# Altium PCB STM32_PCB.PcbDoc
Units mm, origin at the board's own origin, x right, y up, seen from the top; angles counter-clockwise.
Board outline 36 x 36 mm, 4 copper layers (L1(SIGNAL), L2 (GND), L3 (GND), L4 (SIGNAL)), stack 1.57 mm thick; 36 components, 27 nets, 176 pads, 65 vias.
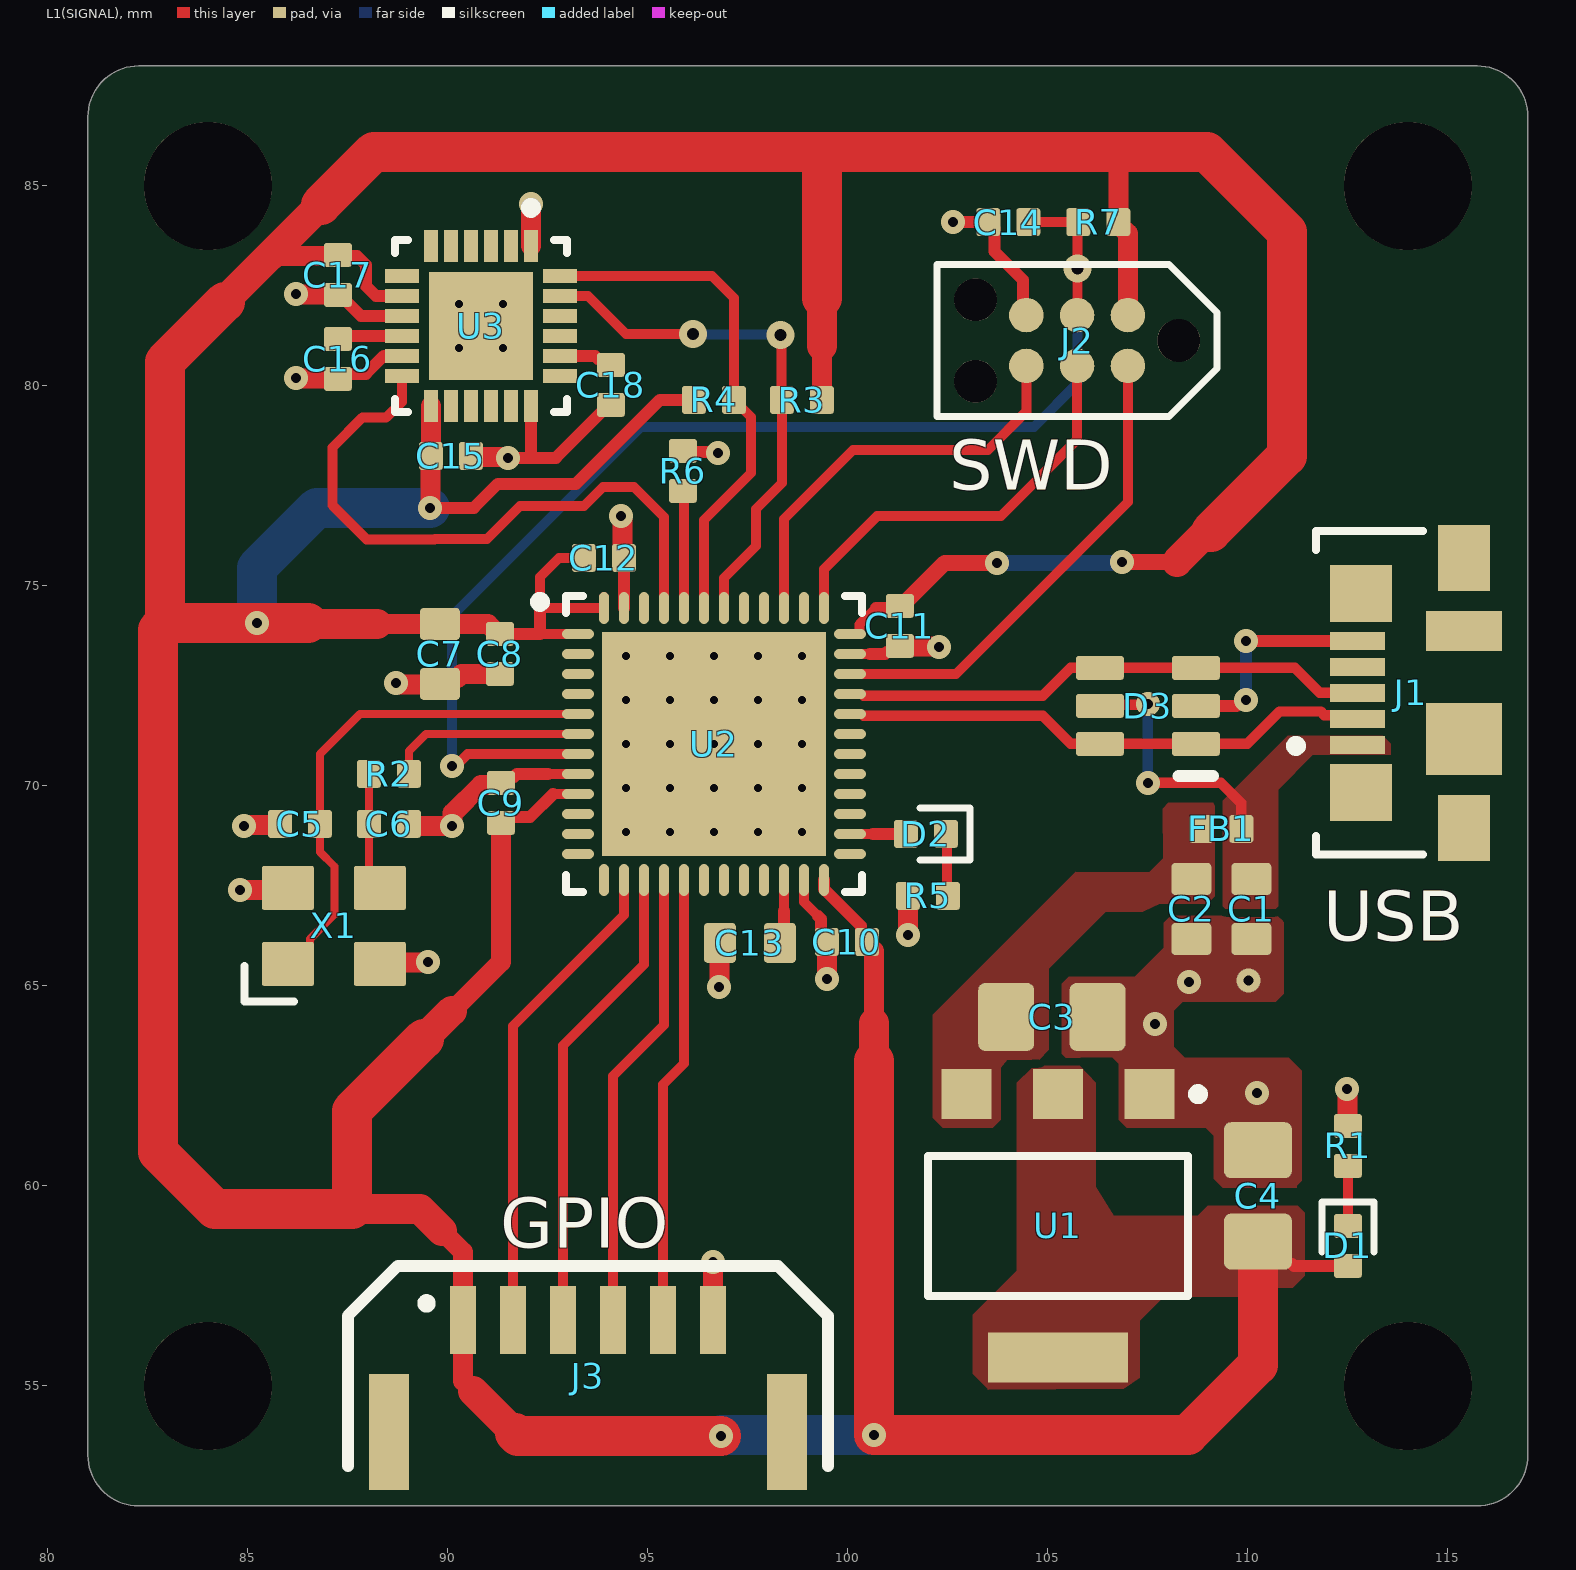
[diagram p0: L1(SIGNAL) view]
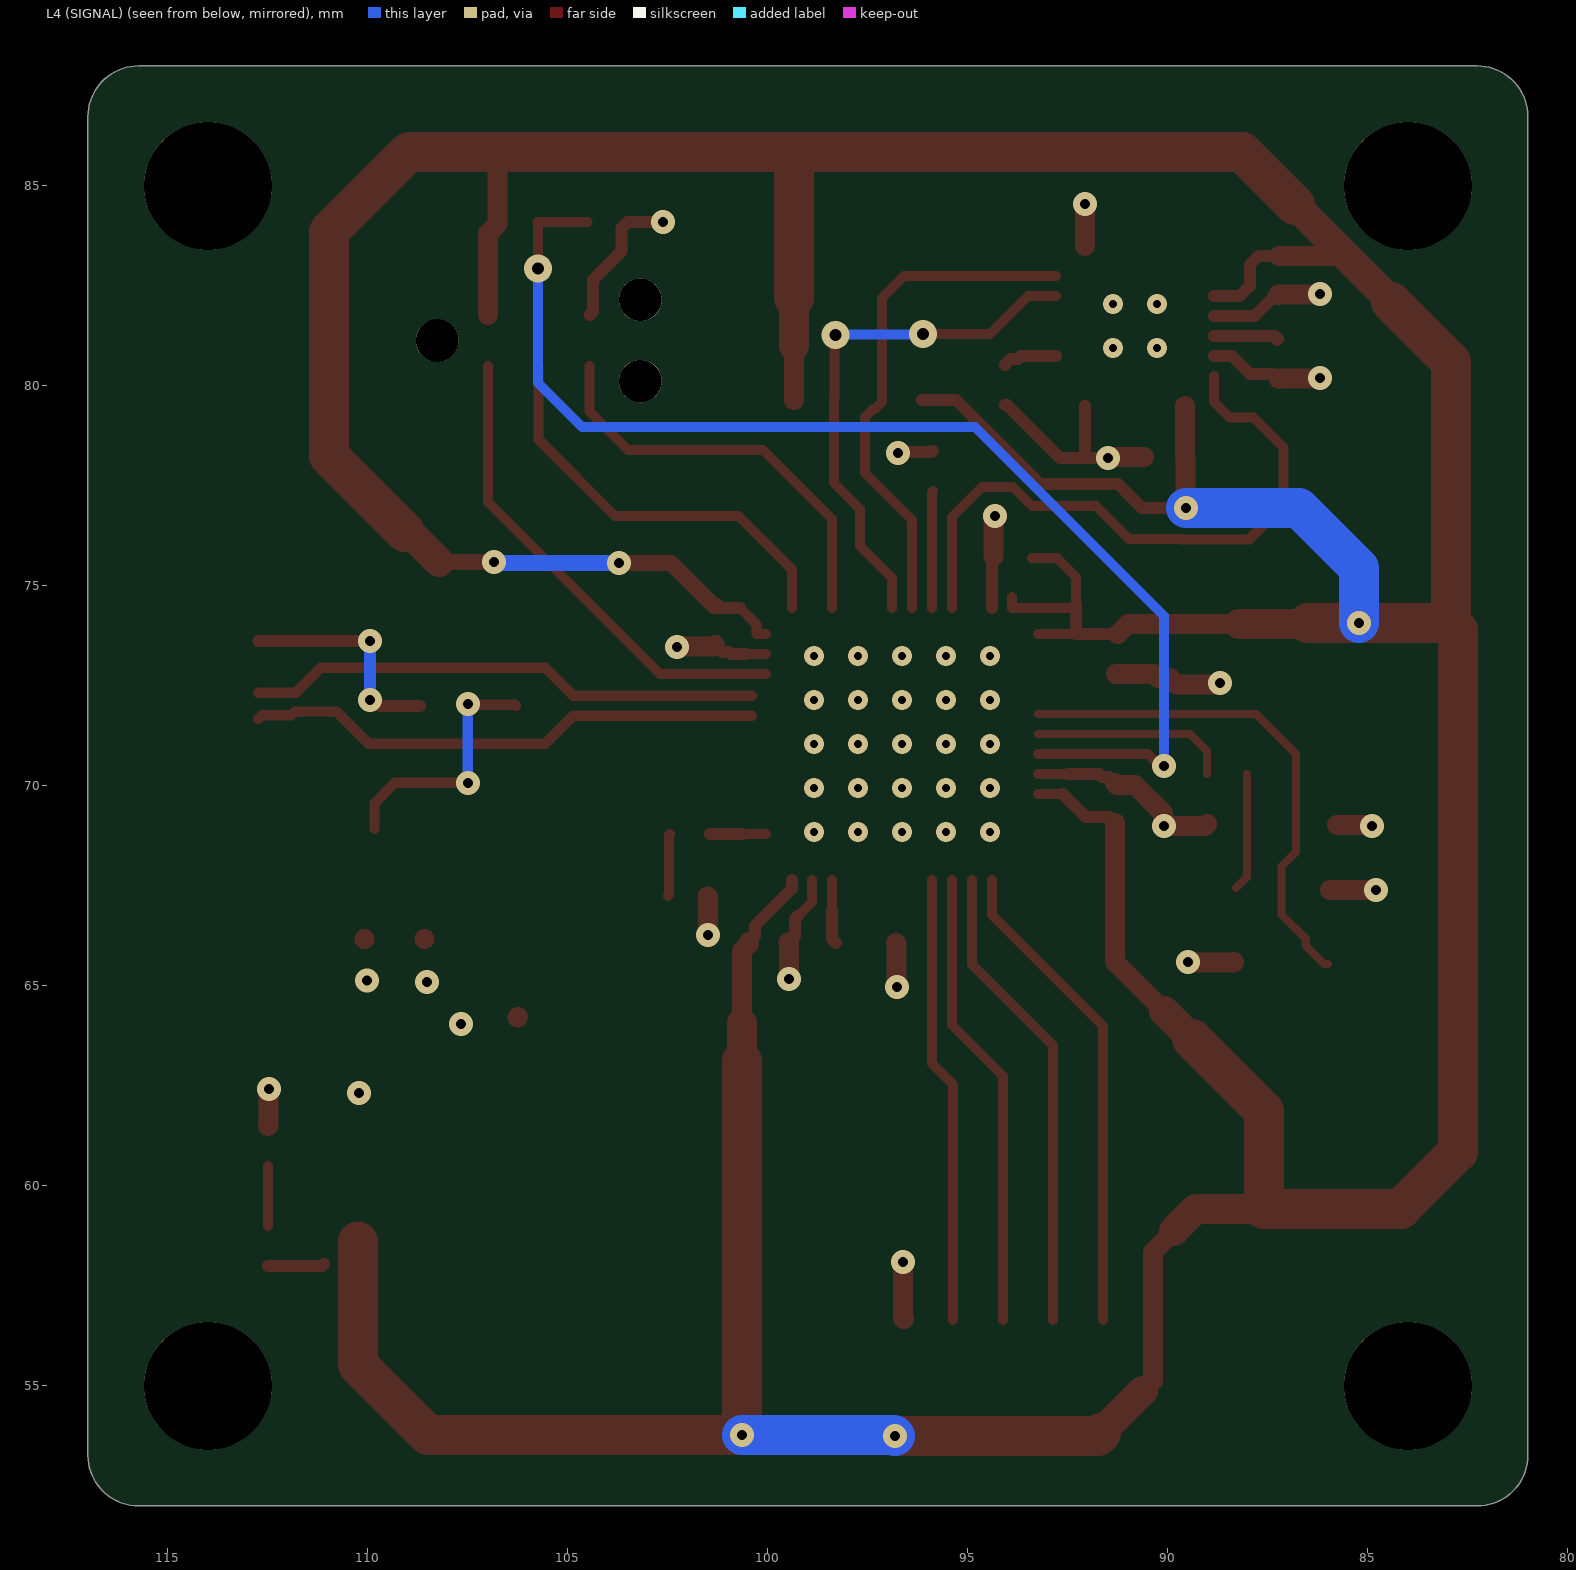
[diagram p1: L4 (SIGNAL) view, seen from below]
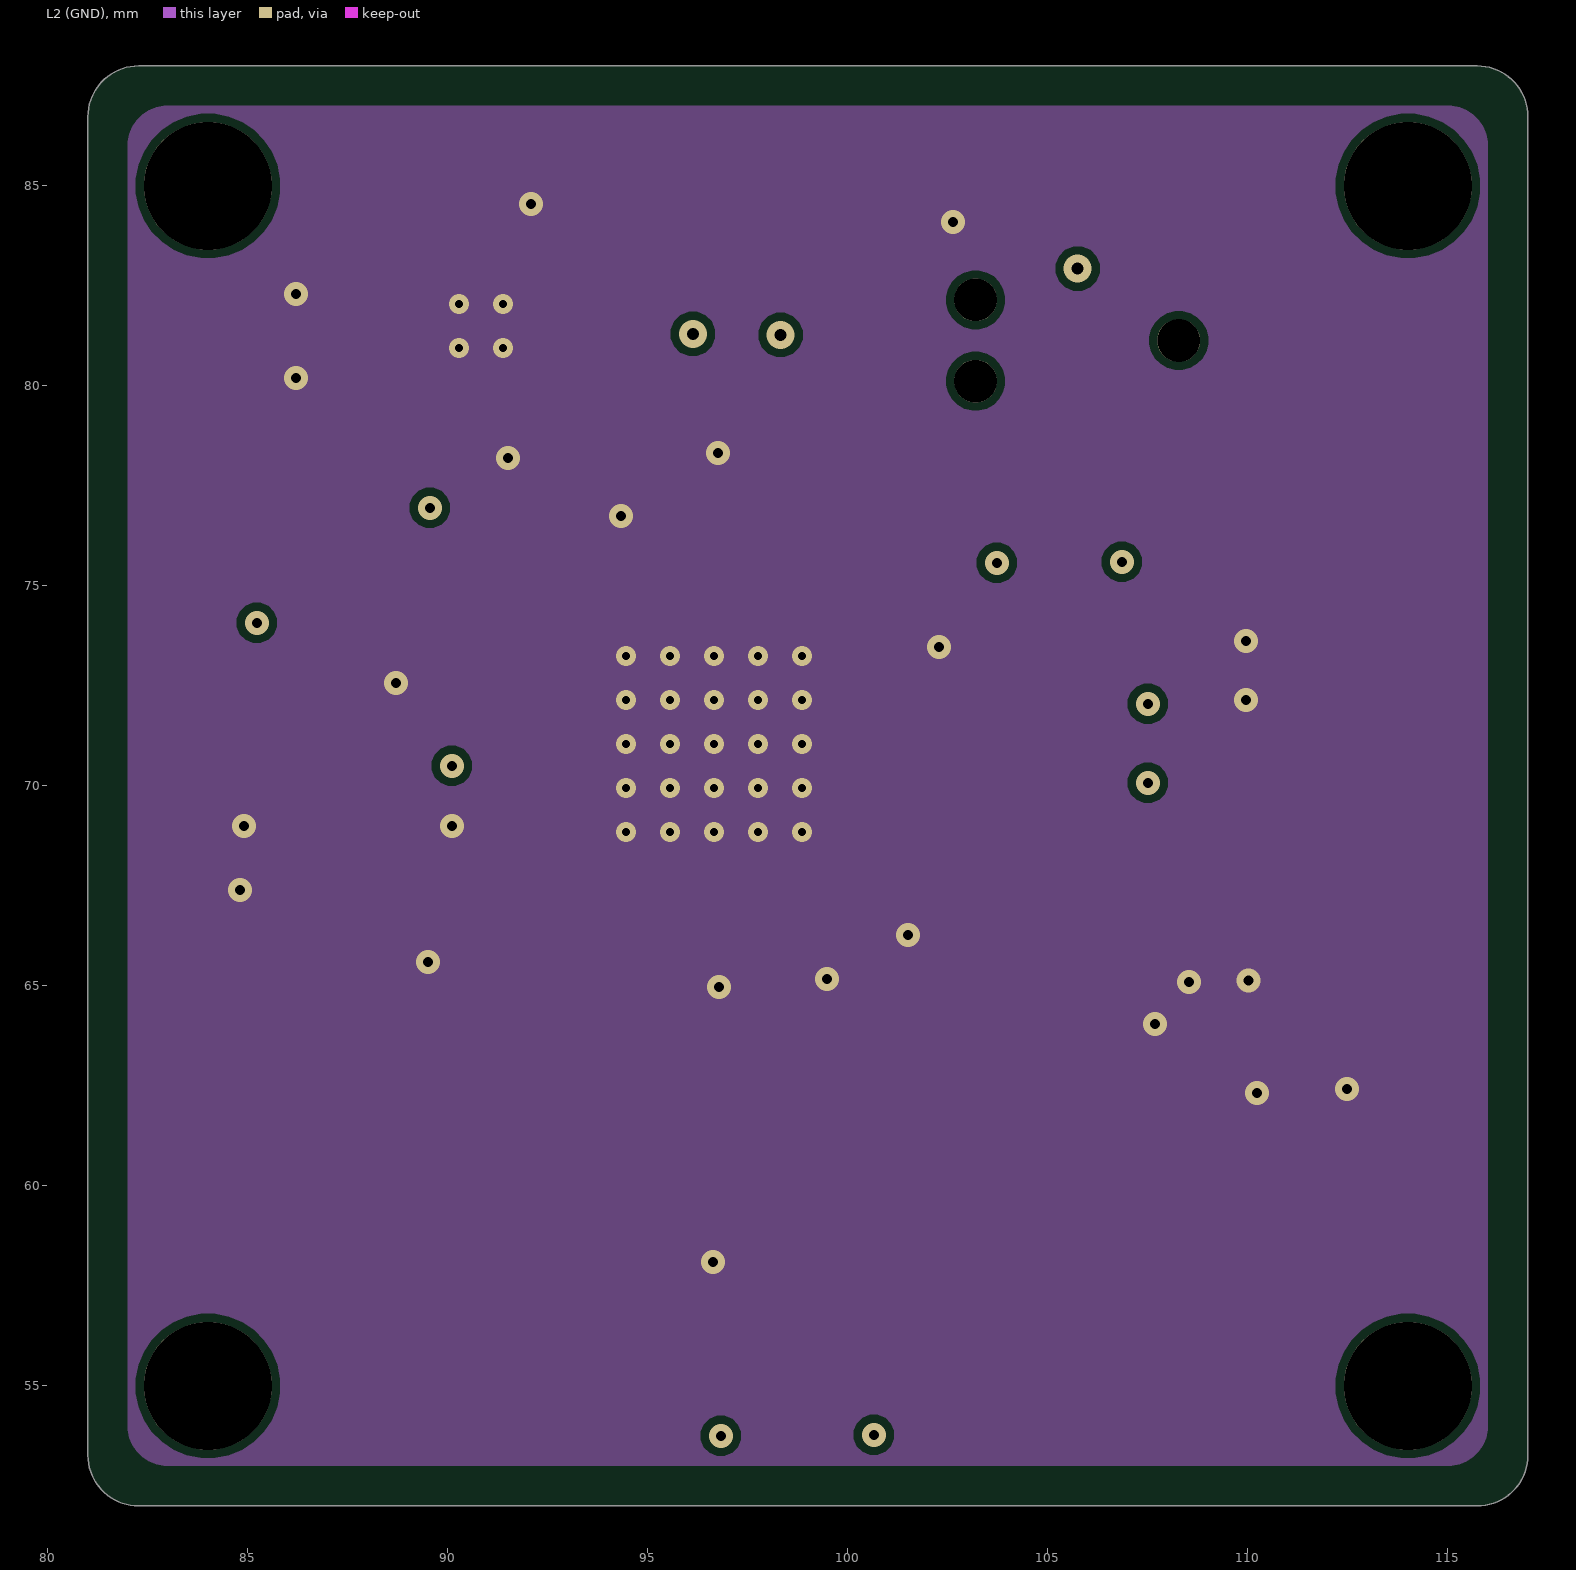
[diagram p2: L2 (GND)]
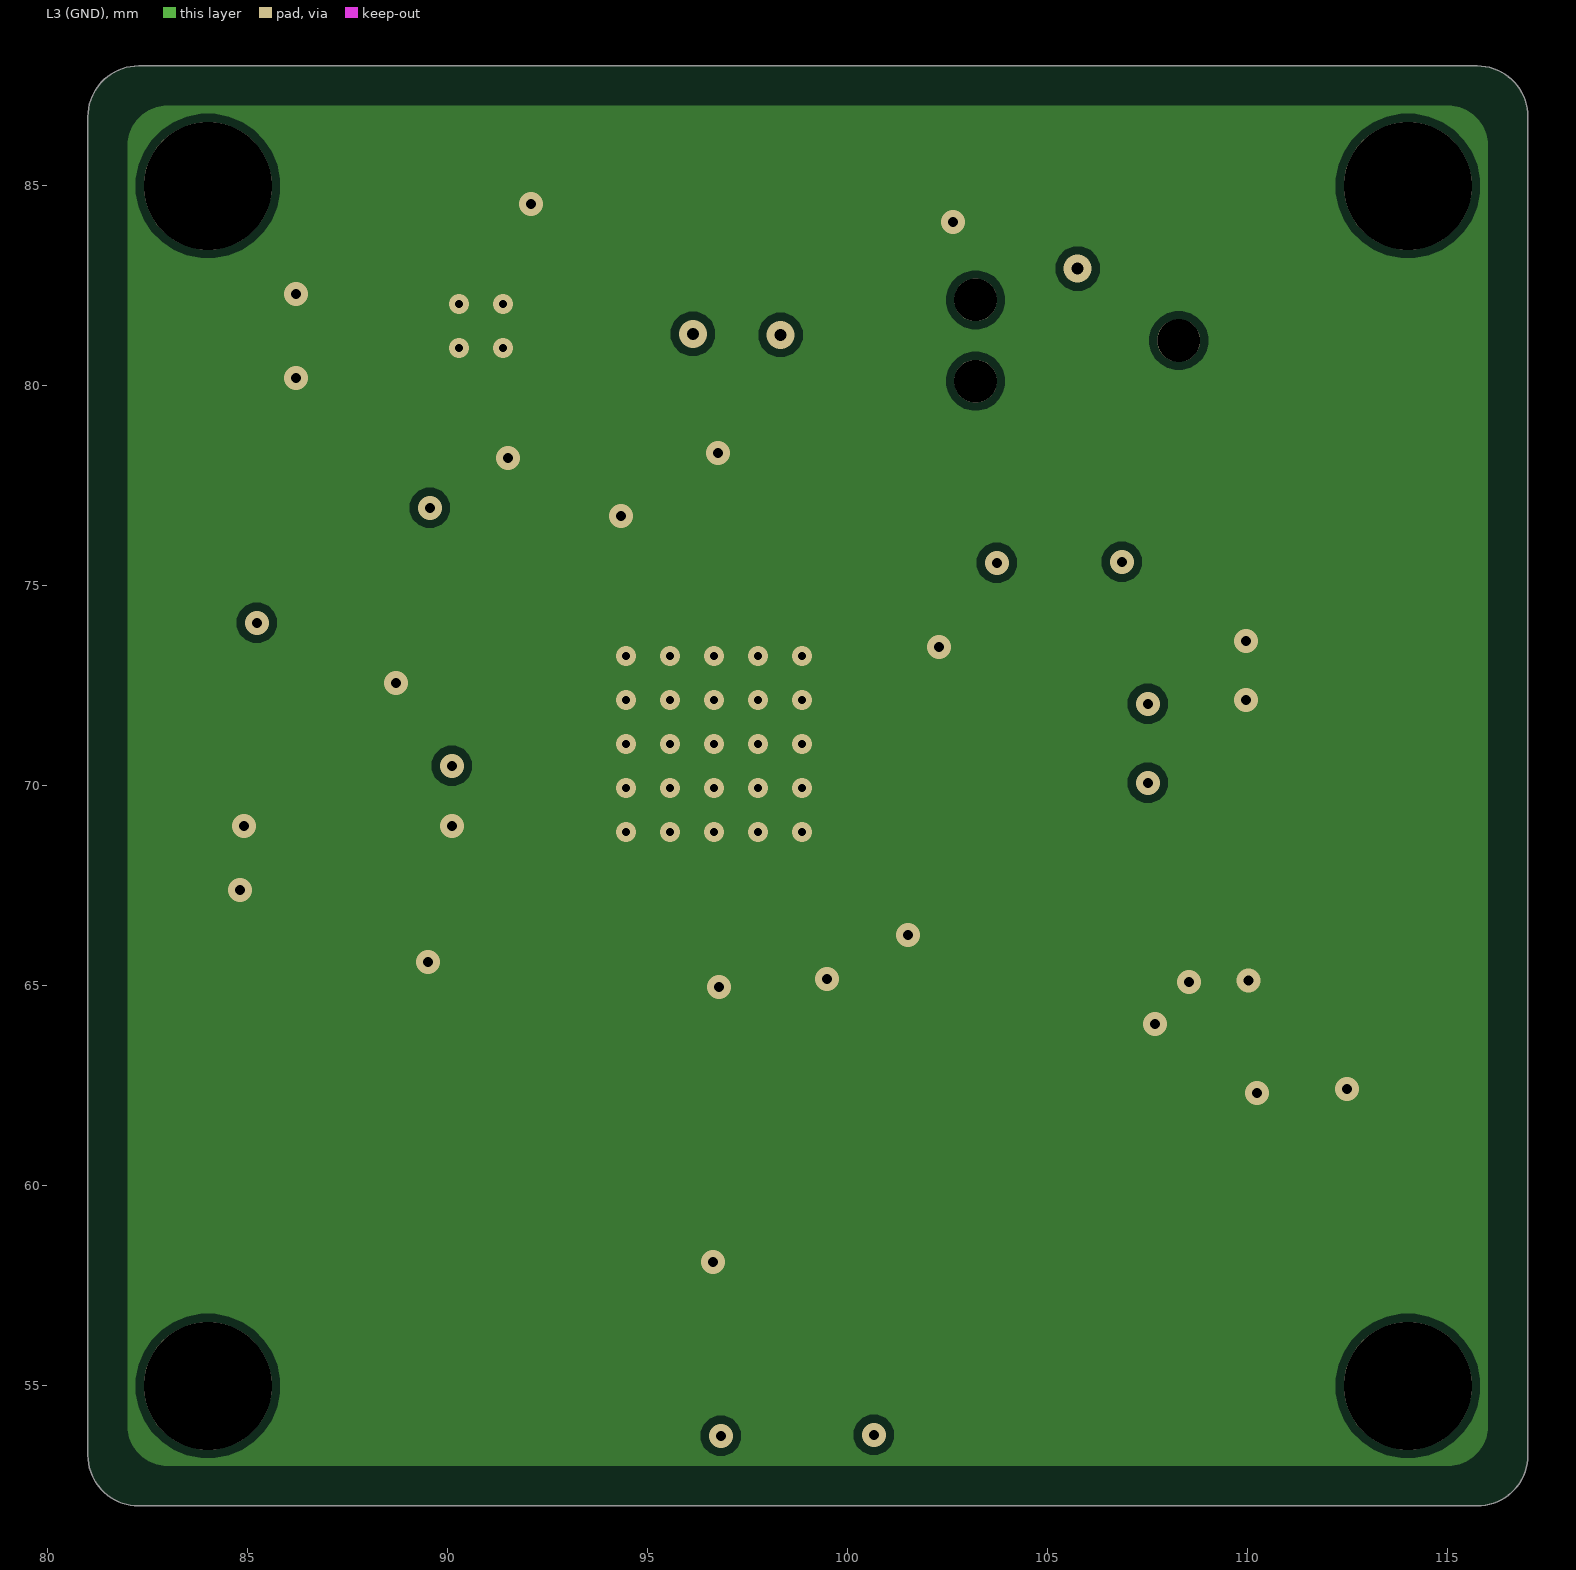
[diagram p3: L3 (GND)]
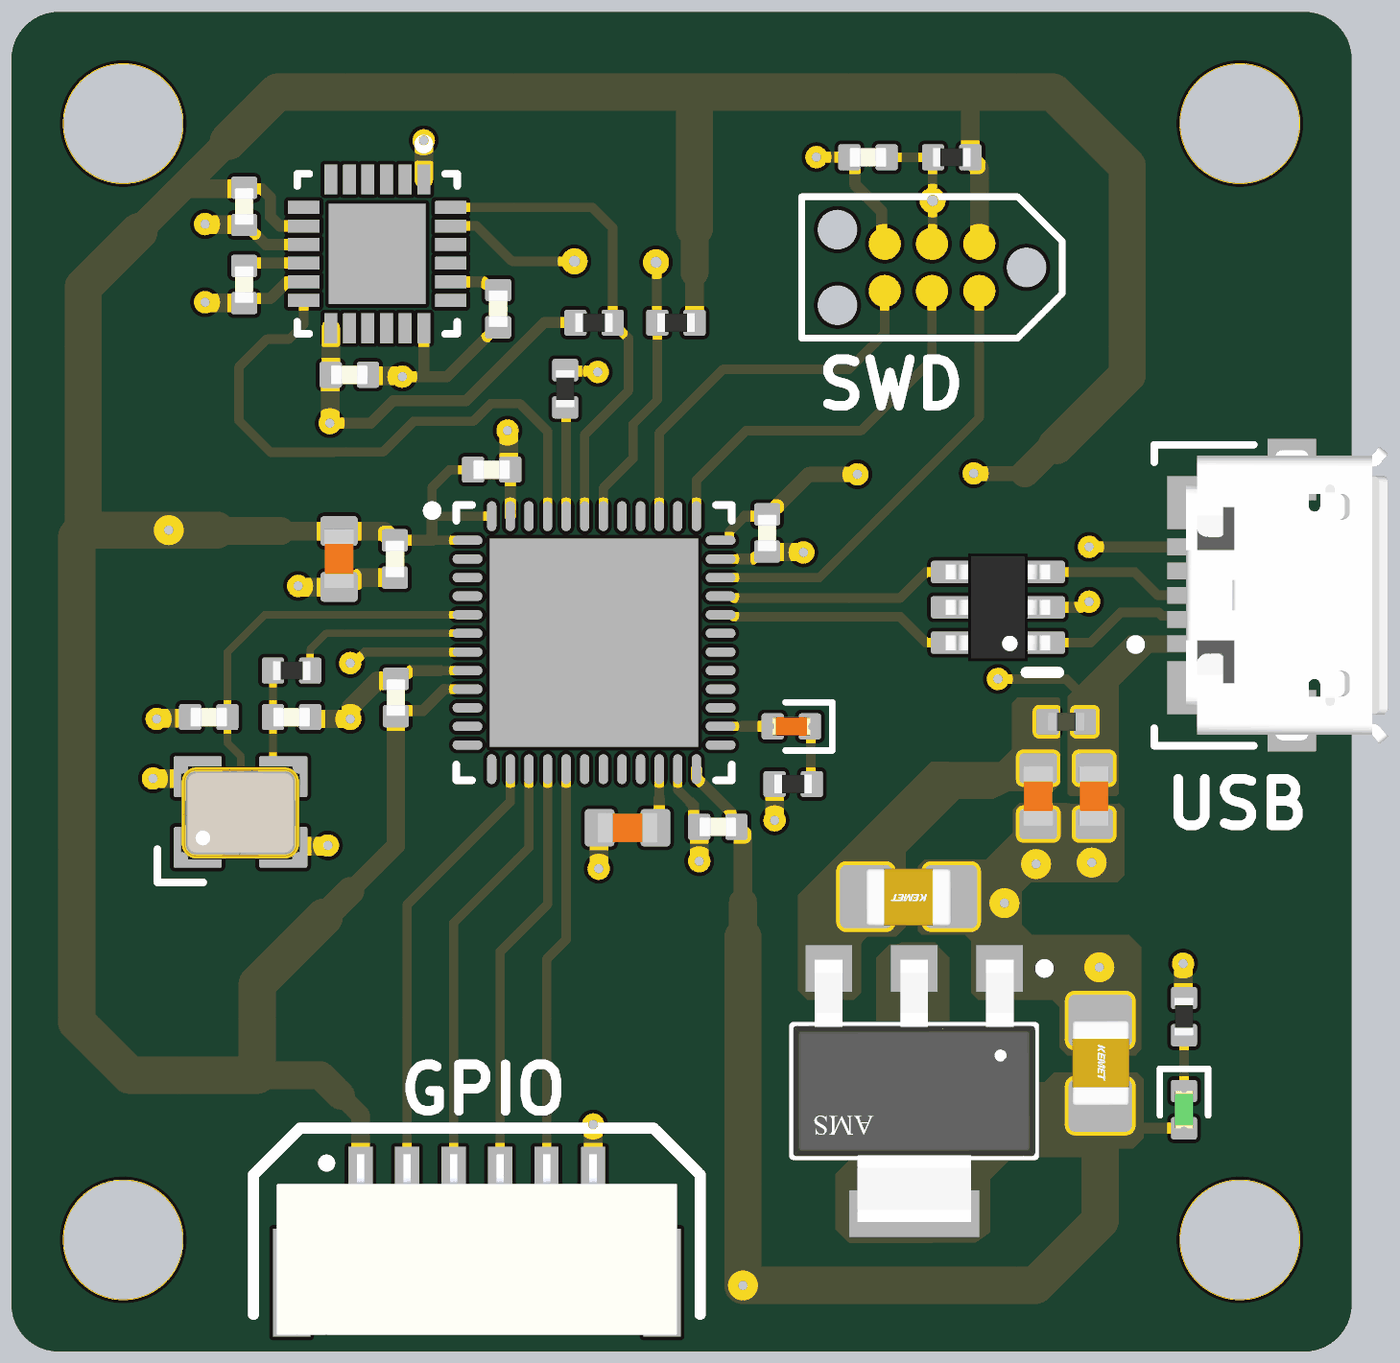
[diagram p4: 3D render of the assembled board from above, using the file's embedded part models]

## Layer stack, top to bottom
Top Solder: solder mask 0.0254, SM-001, Dk 4
L1(SIGNAL): signal copper 0.035
Dielectric 1: prepreg 0.2, PP-017, Dk 4.6
L2 (GND): signal copper 0.0175
Dielectric 3: core 1.065, Core-039, Dk 4.6
L3 (GND): signal copper 0.0175
Dielectric 5: prepreg 0.2, PP-017, Dk 4.6
L4 (SIGNAL): signal copper 0.035
Bottom Solder: solder mask 0.0254, SM-001, Dk 4

## Board outline
81,53.27 81,86.73 cw(c82.27,86.73) 82.27,88 115.73,88 cw(c115.73,86.73) 117,86.73 117,53.27 cw(c115.73,53.27) 115.73,52 82.27,52 cw(c82.27,53.27)

## Design rules (kind name [scope] priority, off if disabled: settings)
Clearance [All] p1: gap=0.2 ignorepadtopadclearanceinfootprint=FALSE
DiffPairsRouting [All] p1: maxlimit=0.254 minlimit=0.203 mostfreqgap=0.254 toplayer_maxgap=0.203 toplayer_prefgap=0.203 toplayer_minwidth=0.26 toplayer_maxwidth=0.26 toplayer_prefwidth=0.26 bottomlayer_maxgap=0.203 bottomlayer_prefgap=0.203 bottomlayer_minwidth=0.26 bottomlayer_maxwidth=0.26 bottomlayer_prefwidth=0.26 impedanceprofiledriven=TRUE impedanceprofileid={52C9BAE3-9ECD-4616-9FF6-915F4172493B} impedanceprofilevalue=90.000000 maxuncoupledlength=12.7
MinimumSolderMaskSliver [All] p1: minsoldermaskwidth=0.12
PolygonConnect [All] p1: connectstyle=Direct reliefconductorwidth=0.254 reliefentries=4 polygonreliefangle="90 Angle" airgapwidth=0.254
RoutingVias [All] p1: holewidth=0.3 width=0.7 viastyle="Through Hole" minholewidth=0.25 minwidth=0.55 maxholewidth=0.4 maxwidth=0.9
SolderMaskExpansion [All] p1: expansion=0.102 istentingtop=FALSE
SupplyNets "Schematic Supply Nets_4" [InNet('GND')] p1: voltage=0.000
SupplyNets "Schematic Supply Nets_2" [InNet('+3V3')] p2: voltage=0.000
SupplyNets "Schematic Supply Nets_1" [InNet('VBUS')] p3: voltage=0.000
SupplyNets "Schematic Supply Nets" [InNet('+5V')] p4: voltage=0.000
UnRoutedNet [All] p1: checkbadconnections=TRUE
Width [All] p1: maxlimit=1 minlimit=0.2 preferedwidth=0.3 midlayer1_minwidth=0.254 midlayer1_maxwidth=0.254 midlayer1_prefwidth=0.254 midlayer2_minwidth=0.254 midlayer2_maxwidth=0.254 midlayer2_prefwidth=0.254 minimp=50.000000 maximp=50.000000 favimp=50.000000
27 further rules are at their usual default settings.

## Classes and differential pairs
differential pair USB_D: +USB_D_P -USB_D_N

## Components (designator, comment, footprint, x,y, rotation, side; value= is the part's Value field where it differs from the comment)
C1 "2u2" CAP_0603 110.085,66.925 r90 top
C2 "2u2" CAP_0603 108.585,66.925 r90 top
C3 "22u" CAP_0805 105.1,64.225 r180 top
C4 "22u" CAP_0805 110.25,59.75 r270 top
C5 "10p" CAP_0402 86.3,69.05 r0 top
C6 "10p" CAP_0402 88.525,69.05 r180 top
C7 "2u2" CAP_0603 89.8,73.3 r90 top
C8 "100n" CAP_0402 91.3,73.3 r90 top
C9 "100n" CAP_0402 91.325,69.575 r270 top
C10 "100n" CAP_0402 99.975,66.1 r0 top
C11 "100n" CAP_0402 101.3,74 r90 top
C12 "100n" CAP_0402 93.9,75.7 r180 top
C13 "2u2" CAP_0603 97.55,66.075 r0 top
C14 "100n" CAP_0402 104.01,84.095 r0 top
C15 "0u1" CAP_0402 90.075,78.25 r180 top
C16 "0u1" CAP_0402 87.25,80.675 r90 top
C17 "0u1" CAP_0402 87.25,82.775 r90 top
C18 "0u1" CAP_0402 94.075,80.025 r90 top
D1 "GREEN" LED_0402_GREEN 112.5,58.5 r90 top
D2 "RED" LED_0402_RED 101.95,68.8 r0 top
D3 "USBLC6-2SC6" SOT-23-6 107.5,72 r90 top
FB1 "120R" FB_0402 109.335,68.925 r180 top
J1 "473460001" FP-473460001-MFG 115.05,72.325 r90 top
J2 "TC2030-NL" TC2030-NL-FP 105.73,81.135 r180 top
J3 "SM06B-GHS-TB" SM06B-GHS-TB 93.5,55.25 r0 top
R1 "1k" RES_0402 112.5,61 r270 top
R2 "0k" RES_0402 88.525,70.3 r180 top
R3 "2k2" RES_0402 98.85,79.65 r0 top
R4 "2k2" RES_0402 96.65,79.65 r180 top
R5 "1k" RES_0402 102,67.25 r0 top
R6 "10k" RES_0402 95.875,77.875 r270 top
R7 "10k" RES_0402 106.26,84.095 r0 top
U1 "AMS1117-3.3" FP-AMS1117-IPC_C 105.25,59 r270 top
U2 "STM32F411CEU6" STM-UFQFPN48_L 96.65,71.05 r0 top
U3 "MPU-6050" IS-QFN-24_V 90.825,81.5 r270 top
X1 "24MHz" XTAL_3225 87.15,66.5 r0 top

## Footprints (in the part's own frame and the unit in brackets; to place one, negate y for a bottom-side part, rotate by r counter-clockwise, add the part's x,y. Pads: shape width x height; smd on the part's side, far side on the other; paste and mask are expansions set on the pad)
CAP_0402 [mm]
  rrect25% 0.6x0.7 smd: 1(-0.5,0) 2(0.5,0)
  body extent -0.5,-0.26 0.5,0.26, height 0.37
CAP_0603 [mm]
  rrect25% 0.8x1 smd: 1(-0.75,0) 2(0.75,0)
  body extent -0.8,-0.4 0.8,0.4, height 0.51
CAP_0805 [mm]
  rrect25% 1.4x1.7 smd: 1(-1.143,0) 2(1.143,0)
  body extent -1.15,-0.76 1.15,0.79, height 1.01
FB_0402 [mm]
  rrect25% 0.6x0.7 smd: 1(-0.5,0) 2(0.5,0)
  body extent -0.5,-0.25 0.5,0.25, height 0.51
FP-473460001-MFG [mm]
  rect 0.45x1.38 smd paste+0 mask+0: 1(-1.3,2.31) 2(-0.65,2.31) 3(0,2.31) 4(0.65,2.31) 5(1.3,2.31)
  rect 1.425x1.55 smd paste+0 mask+0: 6(-2.488,2.225) 7(2.488,2.225)
  rect 1.65x1.3 smd paste+0 mask+0: 8(-3.375,-0.35) 11(3.375,-0.35)
  rect 1.8x1.9 smd paste+0 mask+0: 9(-1.15,-0.35)
  rect 1x1.9 smd paste+0 mask+0: 10(1.55,-0.35)
  silkscreen extent -4.05,0.67 4.05,3.97, body extent -4.3,-2.48 4.3,3.45, height 0.25
FP-AMS1117-IPC_C [mm]
  rect 1.25x1.25 smd paste+0 mask+0: 1(-3.295,2.29) 2(-3.295,0) 3(-3.295,-2.29)
  rect 1.25x3.5 smd paste+0 mask+0: 4(3.295,0)
  silkscreen extent -3.42,-3.25 1.75,3.63, body extent -3.9,-3.35 3.9,3.35, height 0.25
IS-QFN-24_V [mm] "QFN, 24-Leads, Body 4x4mm, Pitch 0.5mm, Thermal Pad 2.7x2.6mm"
  rect 0.8x0.35 smd: 1(-2,1.25) 2(-2,0.75) 3(-2,0.25) 4(-2,-0.25) 5(-2,-0.75) 6(-2,-1.25) 13(2,-1.25) 14(2,-0.75) 15(2,-0.25) 16(2,0.25) 17(2,0.75) 18(2,1.25)
  rect 0.35x0.85 smd mask+0.102: 7(-1.25,-1.975) 8(-0.75,-1.975) 9(-0.25,-1.975) 10(0.25,-1.975) 11(0.75,-1.975) 12(1.25,-1.975) 19(1.25,1.975) 20(0.75,1.975) 21(0.25,1.975) 22(-0.25,1.975) 23(-0.75,1.975) 24(-1.25,1.975)
  rect 2.7x2.6 smd: 25(0,0)
  silkscreen extent -3.07,-2.15 2.15,2.15, body extent -2,-2 2,2, height 0.95
LED_0402_GREEN [mm]
  rrect25% 0.6x0.7 smd: A(-0.5,0) K(0.5,0)
  silkscreen extent -0.15,-0.65 1.1,0.65, body extent -0.51,-0.25 0.51,0.25, height 0.45
LED_0402_RED [mm]
  rrect25% 0.6x0.7 smd: A(-0.5,0) K(0.5,0)
  silkscreen extent -0.15,-0.65 1.1,0.65, body extent -0.51,-0.25 0.51,0.25, height 0.45
RES_0402 [mm]
  rrect25% 0.6x0.7 smd: 1(-0.5,0) 2(0.5,0)
  body extent -0.5,-0.25 0.5,0.25, height 0.3
SM06B-GHS-TB [mm]
  rect 0.65x1.7 smd: 1(-3.125,1.4) 2(-1.875,1.4) 3(-0.625,1.4) 4(0.625,1.4) 5(1.875,1.4) 6(3.125,1.4)
  rect 1x2.9 smd: ""(-4.975,-1.4) ""(4.975,-1.4)
  silkscreen extent -6,-2.25 6,2.75, body extent -5.38,-2.8 5.38,2.05, height 4.26
SOT-23-6 [mm]
  rrect25% 0.6x1.2 smd: 1(-0.95,-1.2) 2(0,-1.2) 3(0.95,-1.2) 4(0.95,1.2) 5(0,1.2) 6(-0.95,1.2)
  silkscreen extent -1.75,-1.63 -1.75,-0.76, body extent -1.45,-1.4 1.45,1.4, height 1.45
STM-UFQFPN48_L [mm] "QFN, 48-Leads, Body 7.1x7.1mm, Pitch 0.5mm, Thermal Pad 5.6x5.6mm, IPC High Density"
  oval 0.8x0.25 smd: 1(-3.4,2.75) 2(-3.4,2.25) 3(-3.4,1.75) 4(-3.4,1.25) 5(-3.4,0.75) 6(-3.4,0.25) 7(-3.4,-0.25) 8(-3.4,-0.75) 9(-3.4,-1.25) 10(-3.4,-1.75) 11(-3.4,-2.25) 12(-3.4,-2.75) 25(3.4,-2.75) 26(3.4,-2.25) 27(3.4,-1.75) 28(3.4,-1.25) 29(3.4,-0.75) 30(3.4,-0.25) 31(3.4,0.25) 32(3.4,0.75) 33(3.4,1.25) 34(3.4,1.75) 35(3.4,2.25) 36(3.4,2.75)
  oval 0.25x0.8 smd: 13(-2.75,-3.4) 14(-2.25,-3.4) 15(-1.75,-3.4) 16(-1.25,-3.4) 17(-0.75,-3.4) 18(-0.25,-3.4) 19(0.25,-3.4) 20(0.75,-3.4) 21(1.25,-3.4) 22(1.75,-3.4) 23(2.25,-3.4) 24(2.75,-3.4) 37(2.75,3.4) 38(2.25,3.4) 39(1.75,3.4) 40(1.25,3.4) 41(0.75,3.4) 42(0.25,3.4) 43(-0.25,3.4) 44(-0.75,3.4) 45(-1.25,3.4) 46(-1.75,3.4) 47(-2.25,3.4) 48(-2.75,3.4)
  rect 5.6x5.6 smd: 49(0,0)
  silkscreen extent -4.47,-3.7 3.7,3.7, body extent -3.55,-3.55 3.55,3.55, height 0.6
TC2030-NL-FP [mil]
  round 33.98 smd paste-16.99: 1(-50,-25) 2(-50,25) 3(0,-25) 4(0,25) 5(50,-25) 6(50,25)
  round 42.01 hole 42.01 unplated: MH(-100,0) MH(100,-40) MH(100,40)
  silkscreen extent -138,-75 138,75
XTAL_3225 [mm]
  rrect10% 1.3x1.1 smd: 1(-1.15,-0.95) 2(1.15,-0.95) 3(1.15,0.95) 4(-1.15,0.95)
  silkscreen extent -2.23,-1.89 -1,-1, body extent -1.6,-1.28 1.6,1.22, height 0.61

## Part data
C1 C2 C7 C13: library part CAP_0603, "Capacitor SMD 0603"
C3 C4: library part CAP_0805, "Capacitor SMD 0805"
C5 C6 C8 C9 C10 C11 C12 C14 C15 C16 C17 C18: library part CAP_0402, "Capacitor SMD 0402"
D1: library part LED_0402_GREEN, "LED 0402 GREEN SMD"
D2: library part LED_0402_RED, "LED 0402 RED SMD"
D3: "Low-Capacitance ESD Protection USB", Manufacturer=STMicroelectronics, Distributor Link=https://www.mouser.de/ProductDetail/STMicroelectronics/USBLC6-2SC6?qs=po45yt2pPpu%2FhNIlwQdTlg%3D%3D, Manufacturer Part Number=USBLC6-2SC6
FB1: library part FB_0402, "Ferrite Bead SMD 0402"
J1: library part CMP-2000-05246-2, "CONN RCPT USB2.0 MICRO B SMD R/A", Current Rating=1.8A, Manufacturer=Molex, Package=0, Temperature="-30°C to +85°C", Temperature Range High=+85°C, Temperature Range Low=-30°C, Voltage Rating=30V, Automotive=No, Category=Conn, ComponentLink2Description=Datasheet, ComponentLink2URL=https://www.molex.com/webdocs/datasheets/pdf/en-us/0473460001_IO_CONNECTORS.pdf, Conn Orientation="Right Angle", Contact Material=Gold,Nickel, Device Class L1=Connectors, Device Class L2="USB Connectors", Device Class L3=unset, Digikey Description="CONN RCPT USB2.0 MICRO B SMD R/A", Footprint Url=https://www.molex.com/pdm_docs/sd/473460001_sd.pdf, Height=2.945mm, Is Female=yes, Lead Free=Yes, Manufacturer Part Number=473460001, Number Of Contacts=5, Octopart=https://octopart.com/47346-0001-molex-7164928, Pitch=0.65mm, RoHS=TRUE, Shielding=true, Usb Standard="USB 2.0"
J2: "Tag-Connect No-Solder SWD Debug Connector (No Legs) DO NOT PLACE", Manufacturer=Tag-Connect, Manufacturer Part Number=TC2030-NL-FP
J3: "Header Connector 6 Position 1.25MM Pitch SMD Horizontal JST GH", Manufacturer=JST, Manufacturer Part Number=SM06B-GHS-TB
R1 R2 R3 R4 R5 R6 R7: library part RES_0402, "Resistor SMD 0402"
U1: library part CMP-209535-000001-1, "LDO Voltage Regulators 1A, 3.3V", Dropout Voltage=1.1V, Manufacturer="Advanced Monolithic Systems", Max Junction Temp=+125°C, Max Power Dissipation=1.2W, Max Supply Voltage=15V, Nominal Supply Current=5mA, Output Current=1A, Output Voltage=3.3V, Package=AMS1117, Temperature="-40°C to +125°C", Temperature Range Low=-40°C, Automotive=No, Category=IC, ComponentLink2Description=Datasheet, ComponentLink2URL=http://www.advanced-monolithic.com/pdf/ds1117.pdf, Device Class L1="Integrated Circuits (ICs)", Device Class L2="Power Management ICs", Device Class L3="Voltage Regulators - Linear", Height=1.8mm, Ipc Land Pattern Name=SOT229P700X180-4, Lead Free=Yes, Manufacturer Part Number=AMS1117-3.3, Number Of Outputs=1, Octopart=https://octopart.com/ams1117-3.3-advanced+monolithic+systems-25899300, Output Type=Fixed, RoHS=TRUE, Standoff Height=0.64mm, Temperature Range High=+125°C
U2: library part CMP-0243-00165-1, "ARM Cortex-M4 32-bit MCU+FPU, 512 KB Flash, 128 KB RAM, 36 I/Os, 48-Pin UFQFPN, -40 to 85 degC, Tray", I/Os (High Current)=36, Operating Frequency(F) (Processor speed) (MHz)=100, Package Description=UFQFPN48, Package Reference="48-Pin Ultra Thin Fine Pitch Quad Flat No-Lead, 7 x 7 x 0.6 mm Body, 0.5 mm Pitch, Exposed Pad", Supply Voltage(Vcc) min (V)=1.7, ComponentLink1Description="Manufacturer URL", ComponentLink1URL=http://www.st.com/, ComponentLink2Description=Datasheet, ComponentLink2URL=http://www.st.com/st-web-ui/static/active/en/resource/technical/document/datasheet/DM00115249.pdf, Core="ARM Cortex-M4", DatasheetVersion="Rev. 6", FLASH Size (Prog) (kB)=512, Internal RAM Size (kB)=128, Mounting Technology="Surface Mount", Packing=Tray
U3: library part CMP-1753-00002-2, "3-Axis Gyroscope, Accelerometer and a Digital Motion Processor(TM) (DMP), 2.375 to 3.46 V, -40 to 85 degC, 24-Pin QFN, RoHS, Tape and Reel", Manufacturer=InvenSense, Standard Package=5,000, Category=Sensors,Transducers, Datasheet URL=http://datasheet.octopart.com/MPU-6050-InvenSense-datasheet-14421344.pdf, Datasheet Version="Rev. 3.3, 05/2012", Dynamic Catalog=MPU-6000™Series, Family=Multifunction, Featured Product=MPU-60506-Axis,IntegratedI²CSolution, Manufacturer URL=http://www.invensense.com/, Online Catalog=MPU-6000™Series, Other Names="1428-1007-2 / MPU6050", Output Type=Digital, Sensor Type=MotionTracking, Unit PriceUSD=Digital
X1: library part TSX-3225_24.0000MF15X-AC, "Crystal SMD 24MHz 10PPM 7pF 3225", Manufacturer=Epson, Manufacturer Part Number="TSX-3225 24.0000MF15X-AC"

## Free pads (board coordinates)
  round 3.2 hole 3.2: 1(84,55) 1(84,85) 1(114,55) 1(114,85)

## Via types
v1: diameter 0.6, hole 0.25, L1(SIGNAL) to L4 (SIGNAL), 33 vias
v2: diameter 0.5, hole 0.2, L1(SIGNAL) to L4 (SIGNAL), 29 vias
v3: diameter 0.7, hole 0.3, L1(SIGNAL) to L4 (SIGNAL), 3 vias

## Nets (pads, with @x,y where several pads share a name; then routed paths per layer and width w, separated by ;. In a path a pad name is that pad's centre, name@x,y a point inside that pad or via, vN(x,y) a via of type N, cw(c..) or ccw(c..) an arc to the next point about the centre after c; other vN are vias at no path point)
+3V3: C4.2 C7.2 C8.2 C9.2 C10.2 C11.2 C12.2 C15.2 C17.2 D1.A J2.1 J3.1 R3.2 R4.2 R7.2 U1.2 U1.4 U2.1 U2.9 U2.24 U2.36 U2.48 U3.8 U3.13 | length 180.9
  L1(SIGNAL) w0.25: 92.3,73.8 U2.1 ; 92.629,69.797 92.632,69.8 U2.9 ; C12.2 92.775,75.7 92.3,75.225 92.3,74.55 92.4,74.45 U2.48 U2.48@93.9,74.725 ; U2.36 100.291,73.8 100.291,74.041 100.7,74.45
  L1(SIGNAL) w0.3: C17.2 87.275,83.25 87.725,83.25 87.95,83.025 87.95,82.5 88.2,82.25 U3.8 ; v1(89.55,76.95) 90.65,76.95 91.25,77.55 93.203,77.55 95.303,79.65 R4.2 ; C8.2@91.25,73.8 C8.2 92.3,73.8 92.3,74.55 ; C9.2 91.475,69.225 92.057,69.225 92.629,69.797 ; U2.24 99.4,67.425 100.325,66.5 100.325,66.25 C10.2 ; 100.7,74.45 101.25,74.45 C11.2 ; 111.1,58.05 111.15,58 D1.A
  L1(SIGNAL) w0.4: C11.2 101.35,74.5 102.425,75.575 v1(103.725,75.575) ; v1(106.85,75.6) 108.225,75.6
  L1(SIGNAL) w0.5: 85.55,83.25 C17.2@87.225,83.25 ; 88.225,74.05 C7.2 91,74.05 C8.2@91.25,73.8 ; v1(89.55,76.95) 89.563,76.963 89.563,78.238 C15.2 U3.13 ; 89.85,58.875 90.375,58.35 J3.1 90.375,55.125 90.625,54.875 ; 90.1,64.375 91.325,65.6 C9.2 ; R3.2 99.35,81 ; C10.2 100.475,66.05 100.65,65.875 100.65,64.075 ; 106.7,85.85 106.76,85.79 R7.2 106.76,84.045 107,83.805 J2.1
  L1(SIGNAL) w0.75: 84.425,82.1 84.425,82.125 85.55,83.25 86.825,84.525 ; 86.5,74.075 86.525,74.05 88.225,74.05 ; 87.6,59.425 89.3,59.425 89.85,58.875 ; 89.4,63.675 90.1,64.375 ; 90.625,54.875 91.675,53.825 ; 99.35,81 99.35,82.2 ; 100.65,63.125 100.65,64.075 ; 108.225,75.6 108.975,76.35 109.075,76.35
  L1(SIGNAL) w1: 84.425,82.1 82.925,80.6 82.925,74.075 ; 86.5,74.075 v1(85.225,74.075) 82.925,74.075 ; 86.825,84.525 88.15,85.85 99.35,85.85 ; 89.4,63.675 87.6,61.875 87.6,59.425 84.175,59.425 82.75,60.85 82.75,73.9 82.925,74.075 ; 91.675,53.825 91.75,53.75 v1(96.825,53.75) ; 99.35,82.2 99.35,85.85 ; 100.65,63.125 v1(100.65,53.775) 108.5,53.775 110.25,55.525 C4.2 ; 109.075,76.35 110.975,78.25 110.975,83.85 108.975,85.85 106.7,85.85 99.35,85.85
  L4 (SIGNAL) w0.4: v1(103.725,75.575) 106.825,75.575 v1(106.85,75.6)
  L4 (SIGNAL) w1: v1(85.225,74.075) 85.225,75.45 86.725,76.95 v1(89.55,76.95) ; v1(96.825,53.75) 96.85,53.775 v1(100.65,53.775)
+5V: C2.2 C3.2 FB1.2 U1.3
GND: C1.1 C2.1 C3.1 C4.1 C5.1 C6.1 C7.1 C8.1 C9.1 C10.1 C11.1 C12.1 C13.1 C14.1 C15.1 C16.1 C17.1 C18.1 D3.2 J1.5 J2.5 J3.6 R1.1 R5.1 R6.1 U1.1 U2.8 U2.23 U2.35 U2.47 U2.49 U3.1 U3.9 U3.11 U3.18 U3.25 X1.2 X1.4 | length 45.3
  L1(SIGNAL) w0.25: 92.5,70.3 U2.8 ; U2.23 98.9,67.1 99.25,66.75 ; U2.35 100.55,73.3
  L1(SIGNAL) w0.3: v1(84.9,69) v1@84.925,69.025 ; C5.1@85.775,69.025 C5.1 ; X1.4@85.95,67.4 X1.4 ; C16.1@87.225,80.175 87.237,80.162 C16.1 87.375,80.3 87.95,80.3 88.4,80.75 U3.11 ; C17.1 87.3,82.275 87.825,81.75 U3.9 ; X1.2 X1.2@88.35,65.6 ; C15.1 C15.1@90.6,78.225 ; C9.1@91.328,70.072 91.48,70.225 91.653,70.225 91.728,70.3 92.5,70.3 ; v1@91.475,78.225 v1(91.5,78.2) 92.075,78.2 ; U3.18 92.075,78.2 ; C18.1 94.025,79.525 92.7,78.2 92.075,78.2 ; v1(94.325,76.75) v1@94.363,76.712 ; C12.1@94.363,75.737 C12.1 U2.47 ; R6.1 95.9,78.35 96.725,78.35 v1(96.75,78.325) ; J3.6@96.6,56.675 J3.6 ; 99.25,66.75 99.325,66.675 99.325,66.25 C10.1 C10.1@99.487,66.088 ; 100.55,73.3 100.924,73.3 100.974,73.35 101.15,73.35 C11.1 C11.1@101.325,73.525 ; R5.1 R5.1@101.512,67.238 ; v1(102.625,84.1) 102.628,84.097 103.508,84.097 C14.1 103.66,83.945 103.66,83.365 104.374,82.651 104.374,81.856 J2.5 ; D3.2 109.719,72 109.869,72.15 v1(109.95,72.15) ; v1(109.95,73.625) J1.5
  L1(SIGNAL) w0.5: v1(84.8,67.4) X1.4@85.95,67.4 ; v1@84.925,69.025 C5.1@85.775,69.025 ; v1(86.2,80.2) 86.213,80.187 87.213,80.187 C16.1@87.225,80.175 ; v1(86.2,82.3) 86.213,82.287 87.237,82.287 C17.1 ; X1.2@88.35,65.6 88.369,65.581 89.481,65.581 v1(89.5,65.6) ; v1(88.7,72.575) 88.727,72.575 88.765,72.538 89.788,72.538 89.95,72.7 90.243,72.7 90.343,72.8 C8.1 ; C6.1 89.075,69 v1(90.1,69) 90.119,69.019 90.119,69.319 90.825,70.025 91.275,70.025 C9.1 ; C15.1@90.6,78.225 v1@91.475,78.225 ; U3.1 v1(92.075,84.55) ; C12.1@94.363,75.737 v1@94.363,76.712 ; J3.6@96.6,56.675 96.625,56.7 v1(96.625,58.1) ; v1(96.775,64.975) 96.788,64.988 96.788,66.062 C13.1 ; v1(99.475,65.175) 99.475,66.075 C10.1@99.487,66.088 ; C11.1@101.325,73.525 101.362,73.487 102.263,73.487 v1(102.275,73.475) ; v1(101.5,66.275) 101.5,67.225 R5.1@101.512,67.238 ; C3.1 C3.1@106.255,64.213 ; C2.1@108.58,66.17 C2.1 ; C1.1@110.08,66.17 C1.1 ; v1(112.475,62.425) 112.487,62.413 112.487,61.512 R1.1
  L4 (SIGNAL) w0.3: v1(109.95,72.15) v1(109.95,73.625)
  other v1: 110.225,62.325 107.675,64.05 108.525,65.1 110.019,65.139
  other v2: 94.45,68.85 95.55,68.85 96.65,68.85 97.75,68.85 98.85,68.85 94.45,69.95 95.55,69.95 96.65,69.95 97.75,69.95 98.85,69.95 94.45,71.05 95.55,71.05 96.65,71.05 97.75,71.05 98.85,71.05 94.45,72.15 95.55,72.15 96.65,72.15 97.75,72.15 98.85,72.15 94.45,73.25 95.55,73.25 96.65,73.25 97.75,73.25 98.85,73.25 90.275,80.95 91.375,80.95 90.275,82.05 91.375,82.05
IMU_CPOUT: C18.2 U3.20 | length 1.4
  L1(SIGNAL) w0.3: U3.20 93.675,80.75 93.75,80.675 93.925,80.675 C18.2
IMU_INT: U2.45 U3.12 | length 16.1
  L1(SIGNAL) w0.25: U3.12 88.85,79.6 88.457,79.207 87.858,79.207 87.112,78.46 87.112,77.019 87.964,76.166 89.669,76.166 89.678,76.175 90.975,76.175 91.8,77 93.4,77 93.875,77.475 94.65,77.475 95.4,76.725 U2.45
IMU_REGOUT: C16.2 U3.10 | length 1.7
  L1(SIGNAL) w0.3: C16.2@87.275,81.15 C16.2 87.325,81.25 U3.10
IMU_SCL: R3.1 U2.42 U3.23 | length 13.4
  L1(SIGNAL) w0.25: U3.23 93.5,82.25 94.45,81.3 v3(96.125,81.3) ; U2.42 96.9,75.2 97.7,76 97.7,76.925 98.35,77.575 R3.1 98.338,79.663 98.338,81.251 v3(98.315,81.273)
  L4 (SIGNAL) w0.25: v3(96.125,81.3) 96.138,81.287 98.301,81.287 v3(98.315,81.273)
IMU_SDA: R4.1 U2.43 U3.24 | length 13
  L1(SIGNAL) w0.25: U3.24 96.6,82.75 97.15,82.2 R4.1 97.15,79.6 97.325,79.425 97.375,79.425 97.575,79.225 97.575,77.825 96.4,76.65 U2.43
LED_PWR_K: D1.K R1.2 | length 1.5
  L1(SIGNAL) w0.25: D1.K R1.2
MCU_BOOT0: R6.2 U2.44 | length 2.9
  L1(SIGNAL) w0.25: R6.2 95.9,77.35 U2.44
MCU_LED_A: D2.A U2.26 | length 1.4
  L1(SIGNAL) w0.25: U2.26 100.625,68.8
  L1(SIGNAL) w0.3: 100.625,68.8 D2.A
MCU_LED_K: D2.K R5.2 | length 1.6
  L1(SIGNAL) w0.25: D2.K 102.475,68.775 102.475,67.275 R5.2
MCU_NSRT: C14.2 J2.3 R7.1 U2.7 | length 31.5
  L1(SIGNAL) w0.25: v1(90.1,70.5) 90.195,70.5 90.495,70.8 U2.7 ; C14.2 R7.1 105.745,84.08 105.745,81.785 J2.3
  L4 (SIGNAL) w0.25: v1(90.1,70.5) 90.1,74.25 94.825,78.975 104.65,78.975 105.745,80.07 v3(105.745,82.932)
MCU_OSC_IN: C5.2 U2.5 X1.1 | length 12.8
  L1(SIGNAL) w0.2: X1.1 86.1,65.55 86.55,66 86.55,66.171 87.159,66.78 87.159,67.991 86.8,68.35 C5.2 86.8,70.8 87.8,71.8 U2.5
MCU_OSC_OUT: R2.1 U2.6 | length 5
  L1(SIGNAL) w0.2: R2.1 89.025,70.875 89.45,71.3 U2.6
MCU_PA4: J3.2 U2.14 | length 12.1
  L1(SIGNAL) w0.25: J3.2 91.625,64 94.4,66.775 U2.14
MCU_PA5: J3.3 U2.15 | length 11.8
  L1(SIGNAL) w0.25: J3.3 92.875,63.512 94.9,65.537 U2.15
MCU_PA6: J3.4 U2.16 | length 11.5
  L1(SIGNAL) w0.25: J3.4 94.125,62.746 95.4,64.021 U2.16
MCU_PA7: J3.5 U2.17 | length 11.2
  L1(SIGNAL) w0.25: J3.5 95.375,62.539 95.9,63.064 U2.17
MCU_SWCLK: J2.4 U2.37 | length 10.5
  L1(SIGNAL) w0.25: U2.37 99.4,75.417 100.733,76.75 103.825,76.75 105.73,78.655 J2.4
MCU_SWDIO: J2.2 U2.34 | length 12.1
  L1(SIGNAL) w0.25: U2.34 102.7,72.8 107,77.1 J2.2
MCU_SWO: J2.6 U2.39 | length 10.5
  L1(SIGNAL) w0.25: U2.39 98.4,76.675 100.124,78.399 103.499,78.399 104.46,79.36 J2.6
MCU_VCAP1: C13.2 U2.22 | length 1.6
  L1(SIGNAL) w0.25: 98.4,66.875 U2.22
  L1(SIGNAL) w0.3: C13.2 98.4,66.175 98.4,66.875
USB_D_N: D3.1 D3.6 J1.2 U2.32 | length 13
  L1(SIGNAL) w0.26: U2.32@100.4,71.75 104.87,71.75 105.57,71.05 D3.6 D3.1 109.985,71.05 110.796,71.862 111.822,71.862 111.913,71.77 112.645,71.77 J1.2
USB_D_P: D3.3 D3.4 J1.3 U2.33 | length 12.9
  L1(SIGNAL) w0.26: U2.33@100.4,72.25 104.87,72.25 105.57,72.95 D3.4 D3.3 111.175,72.95 111.8,72.325 J1.3
VBUS: C1.2 D3.5 FB1.1 J1.1 | length 6.4
  L1(SIGNAL) w0.26: D3.5 106.325,72.025 107.475,72.025 v1(107.5,72.05) ; v1(107.5,70.075) 109.325,70.075 109.835,69.565 FB1.1
  L4 (SIGNAL) w0.26: v1(107.5,70.075) v1(107.5,72.05)
XTAL_IN: C6.2 R2.2 X1.3 | length 3
  L1(SIGNAL) w0.2: R2.2 88.025,67.725 X1.3
pads on no net: J1.4 J1.6 J1.7 J1.8 J1.9 J1.10 J1.11 J2.MH J3. U2.2 U2.3 U2.4 U2.10 U2.11 U2.12 U2.13 U2.18 U2.19 U2.20 U2.21 U2.25 U2.27 U2.28 U2.29 U2.30 U2.31 U2.38 U2.40 U2.41 U2.46 U3.2 U3.3 U3.4 U3.5 U3.6 U3.7 U3.14 U3.15 U3.16 U3.17 U3.19 U3.21 U3.22

## Polygon pours and split planes (outlines as drawn)
+3V3 on L1(SIGNAL) "+3V3_L01_P004" (solid, pour order 4): 103.5,54.9 103.508,54.908 106.9,54.925 107.3,55.2 107.3,56.625 107.9,57.225 109.9,57.225 110.275,57.45 111.125,57.45 111.425,57.75 111.425,59.325 111.25,59.5 109,59.5 108.75,59.25 106.65,59.25 106.2,59.975 106.2,62.575 105.802,63 104.65,63 104.225,62.575 104.225,57.875 103.125,56.775 103.125,55.3 103.5,54.925
+5V on L1(SIGNAL) "+5V_L01_P001" (solid, pour order 1): 107.881,68.194 107.681,67.994 107.527,67.841 105.7,67.85 102.125,64.275 102.125,61.7 102.375,61.45 103.625,61.45 103.825,61.65 103.821,62.959 103.986,63.15 104.775,63.15 105.025,63.4 105.025,65.425 106.45,66.85 107.375,66.85 107.8,67.054 108.171,67.054 108.979,67.054 109.262,67.337 109.239,69.374 109.138,69.576 108.014,69.576 107.876,69.433
VBUS on L1(SIGNAL) "VBUS_L01_P000" (solid, pour order 0): 111,71.25 109.375,69.625 109.375,66.993 109.443,66.925 110.687,66.925 110.755,66.993 110.755,69.905 111.625,70.775 113.575,70.775 113.576,71.249 113.575,71.25
GND on L1(SIGNAL) "GND" (solid, pour order 15): 108.075,66.75 107.9,66.575 107.9,65.95 107.175,65.225 105.525,65.225 105.35,65.05 105.35,63.3 105.45,63.2 106.625,63.2 106.775,63.05 106.775,61.65 106.975,61.45 108.95,61.45 109.15,61.25 109.15,60.175 109.375,59.95 111.225,59.95 111.225,60 111.35,60.125 111.35,62.875 111.025,63.2 108.425,63.2 108.15,63.475 108.15,64.375 108.375,64.6 110.7,64.6 110.9,64.8 110.9,66.625 110.775,66.75
GND on L2 (GND) "GND" (solid, pour order 6): 82,86 cw(c83,86) 83,87 115,87 cw(c115,86) 116,86 116,54 cw(c115,54) 115,53 83,53 cw(c83,54) 82,54 82,67
GND on L3 (GND) "GND" (solid, pour order 10): 82,86 cw(c83,86) 83,87 115,87 cw(c115,86) 116,86 116,54 cw(c115,54) 115,53 83,53 cw(c83,54) 82,54 82,67

## Silkscreen, mask and mechanical layers (free items; w line width, h text height)
Top Overlay:
  text "SWD" at 102.529,77.404 h1.25
  text "USB" at 111.879,66.129 h1.25
  text "GPIO" at 91.304,58.454 h1.25
Mechanical 1:
  lines w0.254: 117,53.27 cw(c115.73,53.27) 115.73,52 82.27,52 cw(c82.27,53.27) 81,53.27 81,86.73 cw(c82.27,86.73) 82.27,88 115.73,88 cw(c115.73,86.73) 117,86.73 ; 117.01,53.245 117.01,86.705

## Text inside footprints (layer, text, board x,y; h text height)
D1: Mechanical 13 "+" at 111.992,56.617 h0.5 r90
D2: Mechanical 13 "+" at 100.067,69.308 h0.5